# EAGLE board airswimmer-controller (EAGLE 6.4)
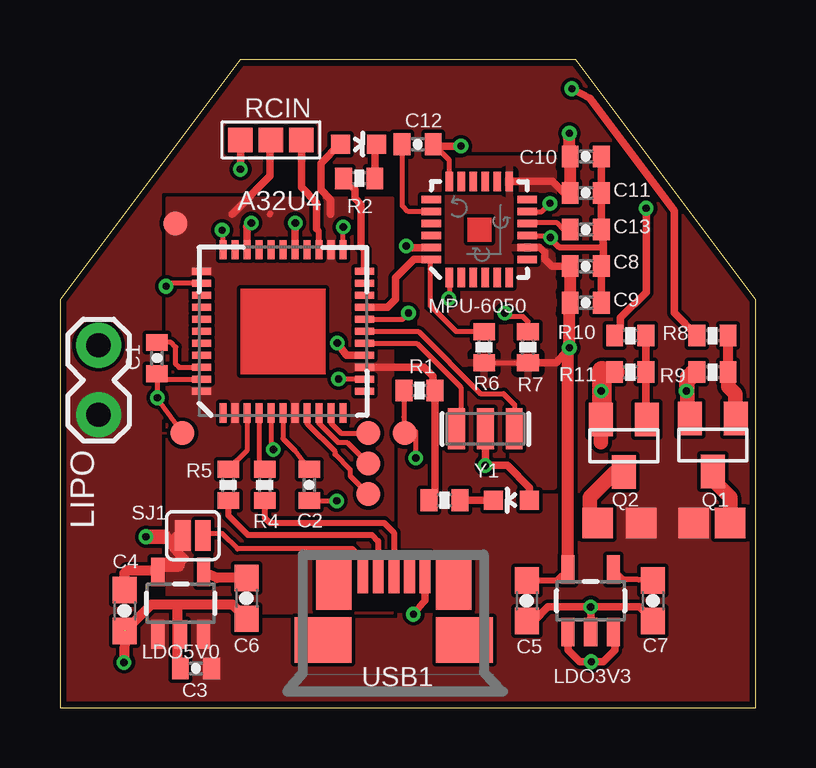
[diagram p0: board, top side]
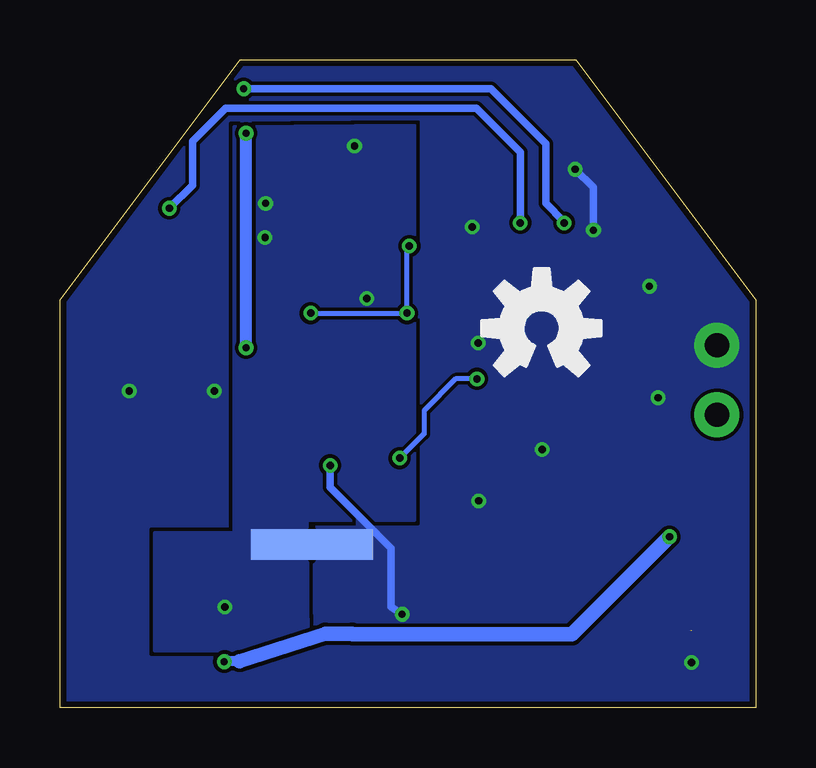
[diagram p1: board, bottom side, seen from below]

Size 29 x 27 mm. Coordinates in mm from the lower left corner, seen from the top.
Outline: 7.5,27 0,17 0,0 29,0 29,17 21.5,27 7.5,27
Copper layers (1*16): Top 0.035mm / dielectric 1.5mm / Bottom 0.035mm
Design rules "Fusion_eagle_rule_v1.1": minimum track width 6mil, minimum drill 12mil, track to track 6mil, track to pad 6mil, pad to pad 6mil, via to via 6mil, smd to smd 0mil, copper to edge 10mil, drill to drill 10mil, minimum pad ring 10mil, minimum via ring 6mil, stop-mask expansion 2mil, vias tented up to drill 100mil, thermal gap 10mil

## Footprints (pad centres in the part's own frame; a part is rotated, then mirrored left to right if it is on the bottom)
ATMEL_QFN-44_SMALL_PAD = smd 0.8 x 0.3: 1 -3.4,2.5; 2 -3.4,2; 3 -3.4,1.5; 4 -3.4,1; 5 -3.4,0.5; 6 -3.4,0; 7 -3.4,-0.5; 8 -3.4,-1; 9 -3.4,-1.5; 10 -3.4,-2; 11 -3.4,-2.5; 23 3.4,-2.5; 24 3.4,-2; 25 3.4,-1.5; 26 3.4,-1; 27 3.4,-0.5; 28 3.4,0; 29 3.4,0.5; 30 3.4,1; 31 3.4,1.5; 32 3.4,2; 33 3.4,2.5 | smd 0.3 x 0.8: 12 -2.5,-3.4; 13 -2,-3.4; 14 -1.5,-3.4; 15 -1,-3.4; 16 -0.5,-3.4; 17 0,-3.4; 18 0.5,-3.4; 19 1,-3.4; 20 1.5,-3.4; 21 2,-3.4; 22 2.5,-3.4; 34 2.5,3.4; 35 2,3.4; 36 1.5,3.4; 37 1,3.4; 38 0.5,3.4; 39 0,3.4; 40 -0.5,3.4; 41 -1,3.4; 42 -1.5,3.4; 43 -2,3.4; 44 -2.5,3.4
SPARKFUN_0402-CAP = smd 0.7 x 0.9: 1 -0.65,0; 2 0.65,0
0603-CAP = smd 1.1 x 1: 1 -0.85,0; 2 0.85,0
0402-CAP = smd 0.7 x 0.9: 1 -0.65,0; 2 0.65,0
ICSP_PAD = smd 1 x 1: P$1 0,0
GND_SHORT = smd 2.54 x 1.27: GND1 -1.27,0; GND2 1.27,0
1X02_LOCK = drill 1.016 pad 1.88: 1 -0.178,0; 2 2.718,0
SOT23-5 = smd 0.55 x 1.2: 1 -0.95,-1.3; 2 0,-1.3; 3 0.95,-1.3; 4 0.95,1.3; 5 -0.95,1.3
LED-0603 = smd 0.8 x 0.8: A 0,-0.75; C 0,0.75
SOLDER_PAD_.05X.05 = smd 1.27 x 1.27: P$1 0,0
QFN-24 = smd 0.8 x 0.3: 1 -2,1.25; 2 -2,0.75; 3 -2,0.25; 4 -2,-0.25; 5 -2,-0.75; 6 -2,-1.25; 13 2,-1.25; 14 2,-0.75; 15 2,-0.25; 16 2,0.25; 17 2,0.75; 18 2,1.25 | smd 0.3 x 0.8: 7 -1.25,-2; 8 -0.75,-2; 9 -0.25,-2; 10 0.25,-2; 11 0.75,-2; 12 1.25,-2; 19 1.25,2; 20 0.75,2; 21 0.25,2; 22 -0.25,2; 23 -0.75,2; 24 -1.25,2
SOT23 = smd 1 x 1.4: 1 -0.95,-1.1; 2 0.95,-1.1; 3 0,1.1
0402-RES = smd 0.7 x 0.9: 1 -0.65,0; 2 0.65,0
3P-SMD-4.1X1.5 = smd 1.016 x 1.016: 00 -1.27,0; 11 1.27,0; MM 0,0
SPARKFUN_SJ_2S = smd 0.635 x 1.27: 1 -0.412,0; 2 0.412,0
MOLEX_MICRO_USB_B_BOTTOM_MOUNT = smd 1.7 x 0.45: 1 2.8,1.3; 2 2.8,0.65; 3 2.8,0; 4 2.8,-0.65; 5 2.8,-1.3 | smd 1.9 x 2.375: GND1 0,2.95; GND4 0,-2.95 | smd 2.1 x 1.475: GND2 2.3,2.5; GND3 2.3,-2.5
RESONATOR-SMD = smd 0.7 x 1.7: 1 -1.2,0; 2 0,0; 3 1.2,0

## Placement (x,y rotation side)
A32U4  ATMEGA32U4QFN  [ATMEL_QFN-44_SMALL_PAD]  9.3,15.69 90 top
C1  0.1uF  [SPARKFUN_0402-CAP]  4.04,14.58 270 top
C2  1uF  [SPARKFUN_0402-CAP]  10.39,9.29 270 top
C3  0.1uF  [SPARKFUN_0402-CAP]  5.67,1.65 180 top
C4  10uF  [0603-CAP]  2.7,4.06 270 top
C5  10uF  [0603-CAP]  19.46,4.47 270 top
C6  470pF  [0603-CAP]  7.78,4.57 270 top
C7  470pF  [0603-CAP]  24.72,4.47 270 top
C8  10nF  [0402-CAP]  21.92,18.41 0 top
C9  0.1uF  [0402-CAP]  21.92,16.89 0 top
C10  10nF  [0402-CAP]  21.92,22.98 0 top
C11  0.1uF  [0402-CAP]  21.92,21.46 0 top
C12  2.2nF  [0402-CAP]  14.91,23.49 0 top
C13  0.1uF  [0402-CAP]  21.92,19.94 0 top
GND  TEST_PAD  [ICSP_PAD]  5.11,11.45 0 top
GND_SHORT  GND_SHORT  [GND_SHORT]  18.5,6.8 180 bottom
JP6  LIPO  [1X02_LOCK]  1.61,12.4 90 top
LDO3V3  [SOT23-5]  22.13,4.47 0 top
LDO5V0  MIC5219  [SOT23-5]  5.03,4.37 0 top
LED1  Blue  [LED-0603]  12.45,23.49 270 top
LED2  Green  [LED-0603]  18.83,8.66 90 top
LOGO1  OSHW-LOGOM  [OSHW-LOGO-M]  8.92,15.82 0 bottom
M1+  SOLDER_PAD.05X.05  [SOLDER_PAD_.05X.05]  26.42,7.72 0 top
M1-  SOLDER_PAD.05X.05  [SOLDER_PAD_.05X.05]  27.94,7.72 0 top
M2+  SOLDER_PAD.05X.05  [SOLDER_PAD_.05X.05]  24.24,7.72 0 top
M2-  SOLDER_PAD.05X.05  [SOLDER_PAD_.05X.05]  22.41,7.72 0 top
MISO  TEST_PAD  [ICSP_PAD]  12.86,8.91 0 top
MOSI  TEST_PAD  [ICSP_PAD]  12.86,11.45 0 top
MPU-6050  MPU-6050  [QFN-24]  17.48,19.94 90 top
Q1  [SOT23]  27.22,10.95 180 top
Q2  [SOT23]  23.51,10.93 180 top
R1  10k  [0402-RES]  14.99,13.23 0 top
R2  330  [0402-RES]  12.48,22.07 180 top
R3  330  [0402-RES]  16.03,8.66 180 top
R4  22  [0402-RES]  8.54,9.29 90 top
R5  22  [0402-RES]  7.01,9.29 90 top
R6  10k  [0402-RES]  17.68,15.03 270 top
R7  10k  [0402-RES]  19.51,15.03 270 top
R8  330  [0402-RES]  27.21,15.52 0 top
R9  330  [0402-RES]  27.21,13.99 0 top
R10  330  [0402-RES]  23.78,15.52 0 top
R11  330  [0402-RES]  23.78,13.99 0 top
RCIN  [3P-SMD-4.1X1.5]  8.79,23.67 0 top
RESET  TEST_PAD  [ICSP_PAD]  14.38,11.45 0 top
SCK  TEST_PAD  [ICSP_PAD]  12.86,10.18 0 top
SJ1  P-USB  [SPARKFUN_SJ_2S]  5.54,7.18 180 top
USB1  MICRO_USB_B_SMD  [MOLEX_MICRO_USB_B_BOTTOM_MOUNT]  13.92,2.84 90 top
VCC  TEST_PAD  [ICSP_PAD]  4.81,20.19 0 top
Y1  16MHz  [RESONATOR-SMD]  17.73,11.63 180 top

## Library data of the parts
A32U4 = JCM; PARTNO: ATMEGA32U4-MU
C1 C3 = LogicA; PARTNO: GMK105BJ104KV-F
C2 = LogicA; PARTNO: LMK105BJ105KV-F
C4 C5 = SparkFun-Capacitors; PARTNO: TCM1A106M8R; TYPE: Tantalum
C6 C7 = SparkFun-Capacitors; PARTNO: C0603C471K5RACTU
C8 C10 = SparkFun-Capacitors; PARTNO: C0402C103K8RACTU
C9 C11 C13 = SparkFun-Capacitors; PARTNO: GMK105BJ104KV-F
C12 = SparkFun-Capacitors; PARTNO: C0402C222K4RACTU
GND GND_SHORT M1+ M1- M2+ M2- MISO MOSI RESET SCK VCC = JCM; PARTNO: DNP
JP6 = SparkFun-Connectors; PARTNO: DNP
LDO3V3 = SparkFun-PowerIC; PARTNO: MIC5219-3.3YM5 TR; PROD_ID: VREG-09872; VALUE: MIC5219 3.3V
LDO5V0 = SparkFun-PowerIC; PARTNO: MIC5219-5.0YM5 TR; PROD_ID: VREG-10107; VALUE: MIC5219 5V
LED1 = SparkFun-LED; PARTNO: LTST-C191TBKT
LED2 = SparkFun-LED; PARTNO: LTST-C190KGKT
LOGO1 = SparkFun-Aesthetics; PARTNO: DNP
MPU-6050 = SparkFun-Sensors; PARTNO: *
Q1 Q2 = SparkFun-DiscreteSemi; PARTNO: DMG6968U-7; PROD_ID: TRANS-08345
R1 = SparkFun-Resistors; PARTNO: CRCW040210K0FKED
R2 R3 = SparkFun-Resistors; PARTNO: CRCW0402330RJNED
R4 R5 = SparkFun-Resistors; PARTNO: CRCW040222R0JNED
R6 R7 = SparkFun-Passives; PARTNO: CRCW040210K0FKED
R8-R11 = SparkFun-Passives; PARTNO: CRCW0402330RJNED
RCIN = discretejcm; PARTNO: DNP
SJ1 = LogicA; PARTNO: DNP
USB1 = JCM; DATASHEET: http://www.molex.com/webdocs/datasheets/pdf/en-us/0473460001_IO_CONNECTORS.pdf; LINK: http://www.molex.com/molex/products/family?key=micro_usb&channel=products&chanName=family&pageTitle=Introduction; MFGPN: 47346-0001; PARTNO: 473460001
Y1 = SparkFun-FreqCtrl; PARTNO: CSTCE16M0V53-R0; PROD_ID: XTAL-08900

## Nets
3.3V: C5.1 C8.1 C9.1 C10.1 C11.1 LDO3V3.5 MPU-6050.8 MPU-6050.13 R6.2 R7.2
A0: A32U4.36
A1: A32U4.37
A2: A32U4.38
A3: A32U4.39
A4: A32U4.40
A5: A32U4.41
AREF: A32U4.42 C1.1
D0: A32U4.20
D1: A32U4.21
D7: A32U4.1
D8/A9: A32U4.28
D11#: A32U4.12
D12/A10: A32U4.26
D13#: A32U4.32
D17: A32U4.11
D+: A32U4.4 R4.2
D-: A32U4.3 R5.2
DGND: C5.2 C7.2 C8.2 C9.2 C10.2 C11.2 C12.2 C13.2 GND_SHORT.GND2 LDO3V3.2 MPU-6050.1 MPU-6050.9 MPU-6050.11 MPU-6050.18
GND: A32U4.5 A32U4.15 A32U4.23 A32U4.33 A32U4.35 A32U4.43 C1.2 C2.2 C3.2 C4.2 C6.2 GND.P$1 GND_SHORT.GND1 JP6.2 LDO5V0.2 LED2.A Q1.2 Q2.2 R9.1 R11.1 RCIN.00 USB1.5 Y1.2
INT_IMU: MPU-6050.12
MISO: A32U4.8 MISO.P$1
MOSI: A32U4.10 MOSI.P$1
MOT1: A32U4.31 R8.1
MOT2: A32U4.27 R10.1
MOT3: A32U4.29
MOT4: A32U4.30
N$1: R4.1 USB1.3
N$2: C6.1 LDO5V0.4
N$3: A32U4.17 Y1.1
N$4: C7.1 LDO3V3.4
N$5: M1-.P$1 Q1.3
N$6: A32U4.16 Y1.3
N$8: LED1.C R2.1
N$9: M2-.P$1 Q2.3
N$10: LED2.C R3.1
N$11: R5.1 USB1.2
N$14: C13.1 MPU-6050.10
N$15: C12.1 MPU-6050.20
N$16: Q1.1 R8.2 R9.2
N$17: Q2.1 R10.2 R11.2
N$33: A32U4.22 R2.2
PWM_IN: A32U4.25 RCIN.11
RAW: C3.1 JP6.1 LDO5V0.1 LDO5V0.3 M1+.P$1 M2+.P$1
RESET: A32U4.13 R1.1 RESET.P$1
SCK: A32U4.9 SCK.P$1
SCL: A32U4.18 MPU-6050.23 R7.1
SDA: A32U4.19 MPU-6050.24 R6.1
UCAP: A32U4.6 C2.1
UVCC: SJ1.1 USB1.1
VCC: A32U4.2 A32U4.7 A32U4.14 A32U4.24 A32U4.34 A32U4.44 C4.1 LDO3V3.1 LDO3V3.3 LDO5V0.5 LED1.A R1.2 R3.2 RCIN.MM SJ1.2 VCC.P$1

## Tracks (layer width: path | path; a pad name or v marks a point on that pad's centre or on a via)
3.3V  (via drill 0.3)
  Top 0.203: 21.24,18.19 C8.1 | 19.49,19.2 MPU-6050.8 | C11.1 21.01,21.46 | 18.74,21.94 MPU-6050.13 | R6.2 R7.2
  Top 0.254: C5.1 20.73,5.32 LDO3V3.5
  Top 0.305: C8.1 20.5,18.41 20.22,18.69 20.22,19 19.97,19.2 19.49,19.2 | 21.01,21.46 20.53,21.94 18.74,21.94 | R7.2 20.69,14.38 v21.24,15.01 | 21.29,16.87 C9.1 21.24,16.85 | 21.22,23.91 v21.24,23.95
  Top 0.508: 21.22,23.91 C10.1 C11.1 | C9.1 C8.1 | 21.24,16.85 v21.24,15.01 21.18,14.95 LDO3V3.5
  Bottom 0.508: v21.24,15.01 v21.24,23.95
  pour Top (isolate 0.076, rank 2): 14.18,9.19 20.58,9.24 20.58,22.86 14.18,22.86
AREF
  Top 0.203: C1.1 4.63,15.24 4.83,15.03 4.83,14.32 4.96,14.19 A32U4.42
D+
  Top 0.203: A32U4.4 8.3,10.18 R4.2
D-
  Top 0.203: A32U4.3 7.8,10.73 R5.2
DGND  (via drill 0.3)
  Top 0.203: MPU-6050.18 16.23,22.83 C12.2 | MPU-6050.11 20.08,20.69 v20.43,21.03 | MPU-6050.9 20.35,19.69 v20.45,19.6 | MPU-6050.1 16.23,17.08 v16.21,17.06
  Top 0.254: v20.45,19.6 20.43,19.58 20.81,19.2 22.52,19.2 22.65,19.33
  Top 0.305: v16.72,23.41 15.64,23.41 C12.2 | C5.2 19.75,3.62 20.35,4.21 v22.13,4.21 | v22.13,4.21 LDO3V3.2 | 24.85,3.49 24.85,3.53 24.16,4.21 v22.13,4.21 | C9.2 C8.2 22.65,18.49 22.65,19.33 C13.2 C11.2 C10.2
  Top 0.508: 24.85,3.49 C7.2
  pour Bottom: 21.75,24.23 14.23,24.28 14.23,7.82 18.7,7.82 18.65,2.38 25.05,2.38 25.05,7.31 21.75,7.31
GND  (via drill 0.3)  (1 unrouted)
  Top 0.203: A32U4.5 8.8,10.96 v8.89,10.77 | A32U4.35 4.54,17.69 v4.42,17.57 | 11.8,19.36 A32U4.23 11.8,20.02 v11.82,20.04 | C1.2 4.28,13.69 A32U4.43 | 4.03,13.92 C1.2 | C2.2 11.53,8.64 v11.54,8.63 | C1.2 4.07,13.9 v4.07,12.92 4.07,12.87 GND.P$1 | A32U4.33 6.8,19.87 v6.76,19.91
  Top 0.254: 4.91,3.14 LDO5V0.2
  Top 0.305: Y1.2 v17.73,10.11 18.65,10.11 19.58,9.18 LED2.A | USB1.5 15.22,4.5 v14.74,3.91 | 22.7,13.17 22.34,13.69 | A32U4.15 11.95,14.69 v11.56,15.21 | 4.91,2.03 4.91,1.96 C3.2 | v7.52,22.45 RCIN.00 | C4.2 2.71,3.21 | 4.91,4.19 5.03,4.31
  Top 0.406: 4.91,2.03 4.91,3.14 4.91,4.19 | 2.7,3.25 v2.67,1.9 | 22.7,13.17 22.68,13.21 22.59,13.21 | 2.71,3.21 3.81,4.31 5.03,4.31 7.18,4.31 C6.2
  Top 0.61: Q2.2 22.56,11.07 | v22.56,13.2 Q2.2 | Q2.2 | Q1.2 26.17,12.16 26.17,13.81 26.34,13.99 R9.1 26.12,13.55 v26.12,13.2
  Top 0.813: Q2.2 22.59,12.8 22.59,13.21 22.59,14.05 R11.1
  Bottom 0.305: v17.73,10.11 17.73,9.19 15.19,6.65 15.19,4.21 v14.74,3.91 | v6.76,19.91 6.76,21.69 v7.52,22.45
  pour Bottom (rank 2, no thermals): 29.87,-0.61 29.37,27.33 -0.1,27.33 -0.1,-0.61
MISO
  Top 0.203: A32U4.8 10.3,11.85 11.46,10.69 11.46,10.56 12.09,9.93 12.09,9.67 MISO.P$1
MOSI
  Top 0.203: A32U4.10 11.3,11.86 11.71,11.45 MOSI.P$1
MOT1  (via drill 0.3)
  Top 0.305: 7.78,20.06 7.8,20.04 A32U4.31 7.8,20.04 v7.98,20.21 | v21.34,25.8 22.1,25.4 25.61,20.72 25.61,16.47 R8.1
  Bottom 0.305: v7.98,20.21 7.98,20.27 8.74,21.03 8.74,23.52 11.03,25.8 v21.34,25.8
MOT2  (via drill 0.3)
  Top 0.305: A32U4.27 9.8,20.21 v9.81,20.21 | v24.44,20.82 24.44,17.32 23.37,16.25 23.37,15.76 R10.1
  Bottom 0.305: v9.81,20.21 9.81,23.16 11.64,24.99 22.1,24.99 23.47,23.62 23.47,21.79 v24.44,20.82
N$1
  Top 0.254: R4.1 8.54,7.92 8.74,7.72 13.52,7.72 13.92,7.31 USB1.3
N$2
  Top 0.406: C6.1 6.53,5.42 LDO5V0.4
N$3
  Top 0.203: A32U4.17 14.94,15.69 17.53,13.1 18.5,13.1 18.95,12.65 18.95,11.65 Y1.1
N$4
  Top 0.254: C7.1 23.48,5.37 LDO3V3.4
N$5
  Top 0.61: Q1.3 27.22,9.51 27.94,8.78 M1-.P$1
N$6
  Top 0.203: A32U4.16 14.88,15.19 16.72,13.36 16.72,11.81 Y1.3
N$8
  Top 0.305: R2.1 13.13,23.42 LED1.C
N$9
  Top 0.61: Q2.3 23.14,9.83 22.1,8.78 22.1,7.82 M2-.P$1
  Top 0.813: Q2.3 23.55,9.81
N$10
  Top 0.305: R3.1 LED2.C
N$11
  Top 0.254: R5.1 7.01,8.02 7.83,7.21 13.01,7.21 13.26,6.96 13.26,5.65
  Top 0.305: 13.26,5.65 USB1.2
N$14
  Top 0.203: C13.1 21.01,19.94 20.73,20.21 19.51,20.21 MPU-6050.10
N$15
  Top 0.203: MPU-6050.20 14.52,20.69 14.28,20.93 14.28,23.48 C12.1
N$16
  Top 0.406: Q1.1 27.96,12.26 | R9.2 R8.2
  Top 0.61: R9.2 27.86,13.39 28.15,13.1 28.15,12.07 Q1.1
N$17
  Top 0.305: Q2.1 24.43,12.08 R11.2 R10.2
N$33
  Top 0.305: A32U4.22 12.7,19.1 12.55,19.25 12.55,20.98 12.3,21.23 12.3,21.6 R2.2
PWM_IN
  Top 0.254: A32U4.25 10.8,19.86 10.7,19.96
  Top 0.305: 10.7,19.96 10.7,21.05 10.06,21.69 RCIN.11
RAW
  pour Top (isolate 0.076, rank 3, no thermals): 29.87,-0.61 29.87,27.58 -0.1,27.58 -0.1,-0.61
RESET  (via drill 0.3)
  Top 0.203: R1.1 14.34,12.13 RESET.P$1 14.84,11.53 v14.84,10.41 | A32U4.13 11.63,13.69 v11.61,13.71
  Bottom 0.203: v11.61,13.71 12.5,13.71 13.82,12.39 13.82,11.43 v14.84,10.41
SCK
  Top 0.203: A32U4.9 10.8,11.86 11.59,11.07 11.97,11.07 SCK.P$1
SCL  (via drill 0.3)
  Top 0.203: R7.1 19.51,16.1 19.31,16.3 18.7,16.3 v18.55,16.46 | A32U4.18 14.27,16.19 v14.53,16.46
  Top 0.305: MPU-6050.23 14.5,19.19 v14.43,19.25
  Bottom 0.203: v18.55,16.46 v14.53,16.46 14.53,19.05 v14.43,19.25
SDA
  Top 0.203: R6.1 16.52,15.68 15.45,16.76 15.45,18.65 MPU-6050.24
  Top 0.305: A32U4.19 13.65,16.69 14,17.04 14,17.93 14.76,18.69 MPU-6050.24
UCAP
  Top 0.203: A32U4.6 9.3,11.22 9.81,10.71 10.37,9.97 C2.1
UVCC
  Top 0.203: USB1.1 12.62,6.22 12.22,6.63 7.4,6.63 6.76,7.26 6.03,7.26 SJ1.1
VCC  (via drill 0.3)
  Top 0.254: 23.14,3.1 LDO3V3.3 | LDO5V0.5 4.18,5.97 | 8.77,20.6 8.74,20.57 | 8.77,23.64 RCIN.MM
  Top 0.305: A32U4.14 15.17,14.19 15.55,13.81 15.55,13.37 R1.2 15.64,8.94 R3.2 | 23.14,3.1 23.14,2.41 22.66,1.93 v22.15,1.93 21.67,1.93 21.18,2.42 LDO3V3.1 | 8.77,23.64 8.77,22.17 7.17,20.57 | LED1.A 11.66,23.49 10.88,22.7 10.88,21.59 11.28,21.18 11.28,20.57
  Top 0.406: 4.91,5.97 5.16,6.22 4.6,6.88 | 4.6,6.88 4.91,7.18 SJ1.2 | 4.35,7.13 4.6,6.88 | C4.1 2.7,5.63 2.8,5.74 4.01,5.74 LDO5V0.5
  Top 0.61: 4.18,5.97 4.91,5.97 | v3.59,7.13 4.35,7.13
  Bottom 0.406: 16.82,3.09 16.79,3.07 | 21.52,1.95 22.13,1.95
  Bottom 0.61: 16.79,3.07 7.65,3.07 v3.59,7.13 | 21.52,1.95 17.94,3.09 16.82,3.09 | 22.13,1.95 v22.15,1.93
  pour Top (no thermals): 4.47,21.23 13.87,21.23 13.87,3.96 4.47,3.96

## Text on the board
tDocu: - | +
bDocu: Air Swimmer / Controller / V0.1 / 10-Apr-2013 | J Moreland / Engineering LLC